# EAGLE board untitled (EAGLE 6.4)
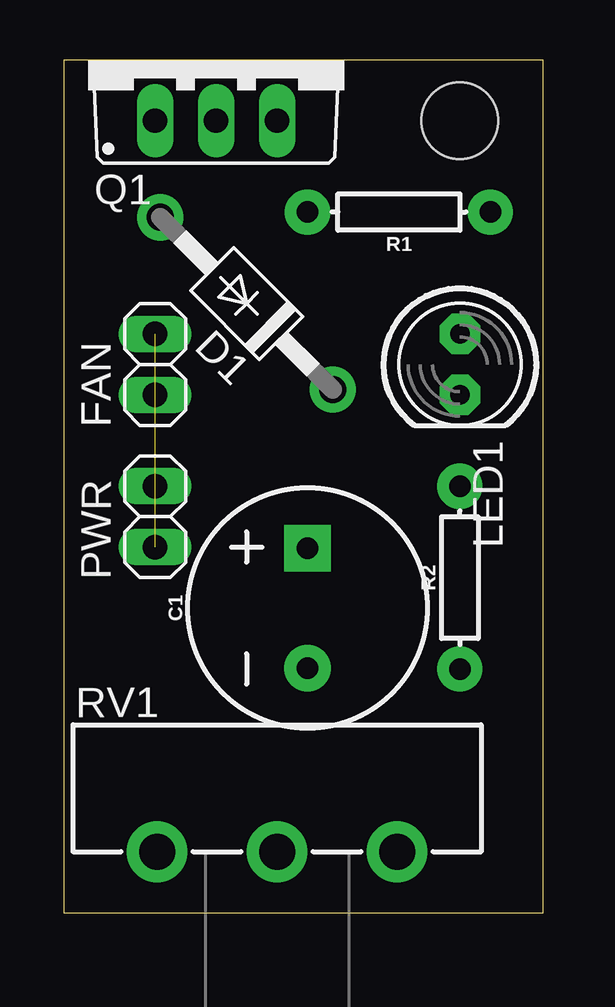
[diagram p0: board, top side]
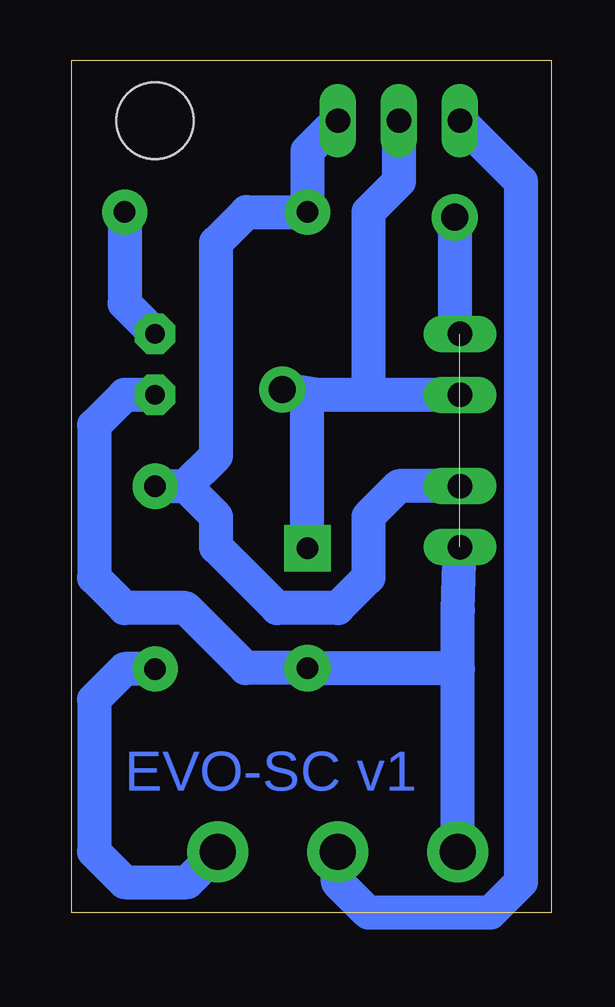
[diagram p1: board, bottom side, seen from below]

Size 19.99 x 35.55 mm. Coordinates in mm from the lower left corner, seen from the top.
Outline: 0,0 19.99,0 19.99,35.55 0,35.55 0,0
Copper layers (1*16): Top 0.035mm / dielectric 1.5mm / Bottom 0.035mm
Design rules "default": minimum track width 10mil, minimum drill 24mil, track to track 8mil, track to pad 8mil, pad to pad 8mil, via to via 8mil, smd to smd 8mil, copper to edge 40mil, drill to drill 8mil, minimum pad ring 10mil, minimum via ring 8mil, stop-mask expansion 4mil, vias tented up to drill 0mil, thermal gap 10mil
Holes 3.2 mm at 16.51,33.02

## Footprints (pad centres in the part's own frame; a part is rotated, then mirrored left to right if it is on the bottom)
CPOL-RADIAL-5MM-10MM = drill 0.9 pad 1.93 square: + 2.5,0 | drill 0.9 pad 1.93: - -2.5,0
DO41-10 = drill 1.118 pad 1.93: A 5.08,0; C -5.08,0
1X02 = drill 1.016 long: 1 -1.27,0; 2 1.27,0
LED5MM = drill 0.813 pad 1.676 octagon: A -1.27,0; K 1.27,0
TO220BV = drill 1.016 long: D 0,-2.54; G -2.54,-2.54; S 2.54,-2.54
AXIAL-0.3 = drill 0.9 pad 1.88: P$1 -3.81,0; P$2 3.81,0
POT_ALPHA_RV16AF-20 = drill 1.5 pad 2.54: 1 -5,0; 2 0,0; 3 5,0

## Placement (x,y rotation side)
C1  1mF  [CPOL-RADIAL-5MM-10MM]  10.16,12.7 90 top
D1  1N4004  [DO41-10]  7.62,25.4 135 top
FAN  [1X02]  3.81,22.86 90 top
LED1  [LED5MM]  16.51,22.86 270 top
PWR  [1X02]  3.81,16.51 90 top
Q1  IRF9530  [TO220BV]  6.35,35.56 0 top
R1  10M  [AXIAL-0.3]  13.97,29.21 180 top
R2  10M  [AXIAL-0.3]  16.51,13.97 90 top
RV1  [POT_ALPHA_RV16AF-20]  8.89,2.54 0 top

## Library data of the parts
C1 = SparkFun-Capacitors; PROD_ID: CAP-09538
D1 LED1 = adafruit
FAN PWR = pinhead
Q1 = transistor-power
R1 R2 = SparkFun-Resistors; PROD_ID: RES-09327
RV1 = SparkFun-Retired; PROD_ID: RES-10002

## Nets
GND: C1.- D1.A FAN.2 LED1.K PWR.1 RV1.1
N$1: R2.P$1 RV1.3
N$3: LED1.A R1.P$1
N$5: Q1.G RV1.2
N$6: C1.+ D1.C FAN.1 Q1.D
VCC: PWR.2 Q1.S R1.P$2 R2.P$2

## Tracks (layer width: path | path; a pad name or v marks a point on that pad's centre or on a via)
GND  (1 unrouted)
  Bottom 1.422: RV1.1 3.89,10.16 | 3.89,10.16 3.89,12.62 PWR.1 | 3.89,10.16 3.93,10.2 C1.- 12.74,10.2 15.24,12.7 17.78,12.7 19.05,13.97 19.05,20.32 17.78,21.59 LED1.K | D1.A 4.03,24.35 FAN.2
N$1
  Bottom 1.422: R2.P$1 17.78,10.16 19.05,8.89 19.05,2.54 17.78,1.27 15.16,1.27 RV1.3
N$3
  Bottom 1.422: R1.P$1 17.78,25.4 LED1.A
N$5
  Bottom 1.422: Q1.G 1.27,30.48 1.27,1.27 2.54,0 7.62,0 8.89,1.27 RV1.2
N$6
  Bottom 1.422: C1.+ 10.16,21.59 D1.C 9.72,21.59 7.62,21.59 | FAN.1 7.62,21.59 | Q1.D 6.35,30.48 7.62,29.21 7.62,21.59
VCC
  Bottom 1.422: R2.P$2 15.24,17.78 | 15.24,17.78 13.97,19.05 13.97,27.94 12.7,29.21 R1.P$2 10.16,31.75 Q1.S | 15.24,17.78 13.97,16.51 13.97,15.24 11.43,12.7 8.89,12.7 7.62,13.97 7.62,16.51 6.35,17.78 PWR.2

## Text on the board
Bottom: EVO-SC v1